# Altium PCB Step Moter Control (1).PcbDoc
Units mil, origin at the board's own origin, x right, y up, seen from the top; angles counter-clockwise.
Board outline 1555.12 x 1653.54 mil, 4 copper layers (Top Layer, Mid-Layer 1, Mid-Layer 2, Bottom Layer), stack 62.296 mil thick; 20 components, 23 nets, 80 pads, 22 vias.
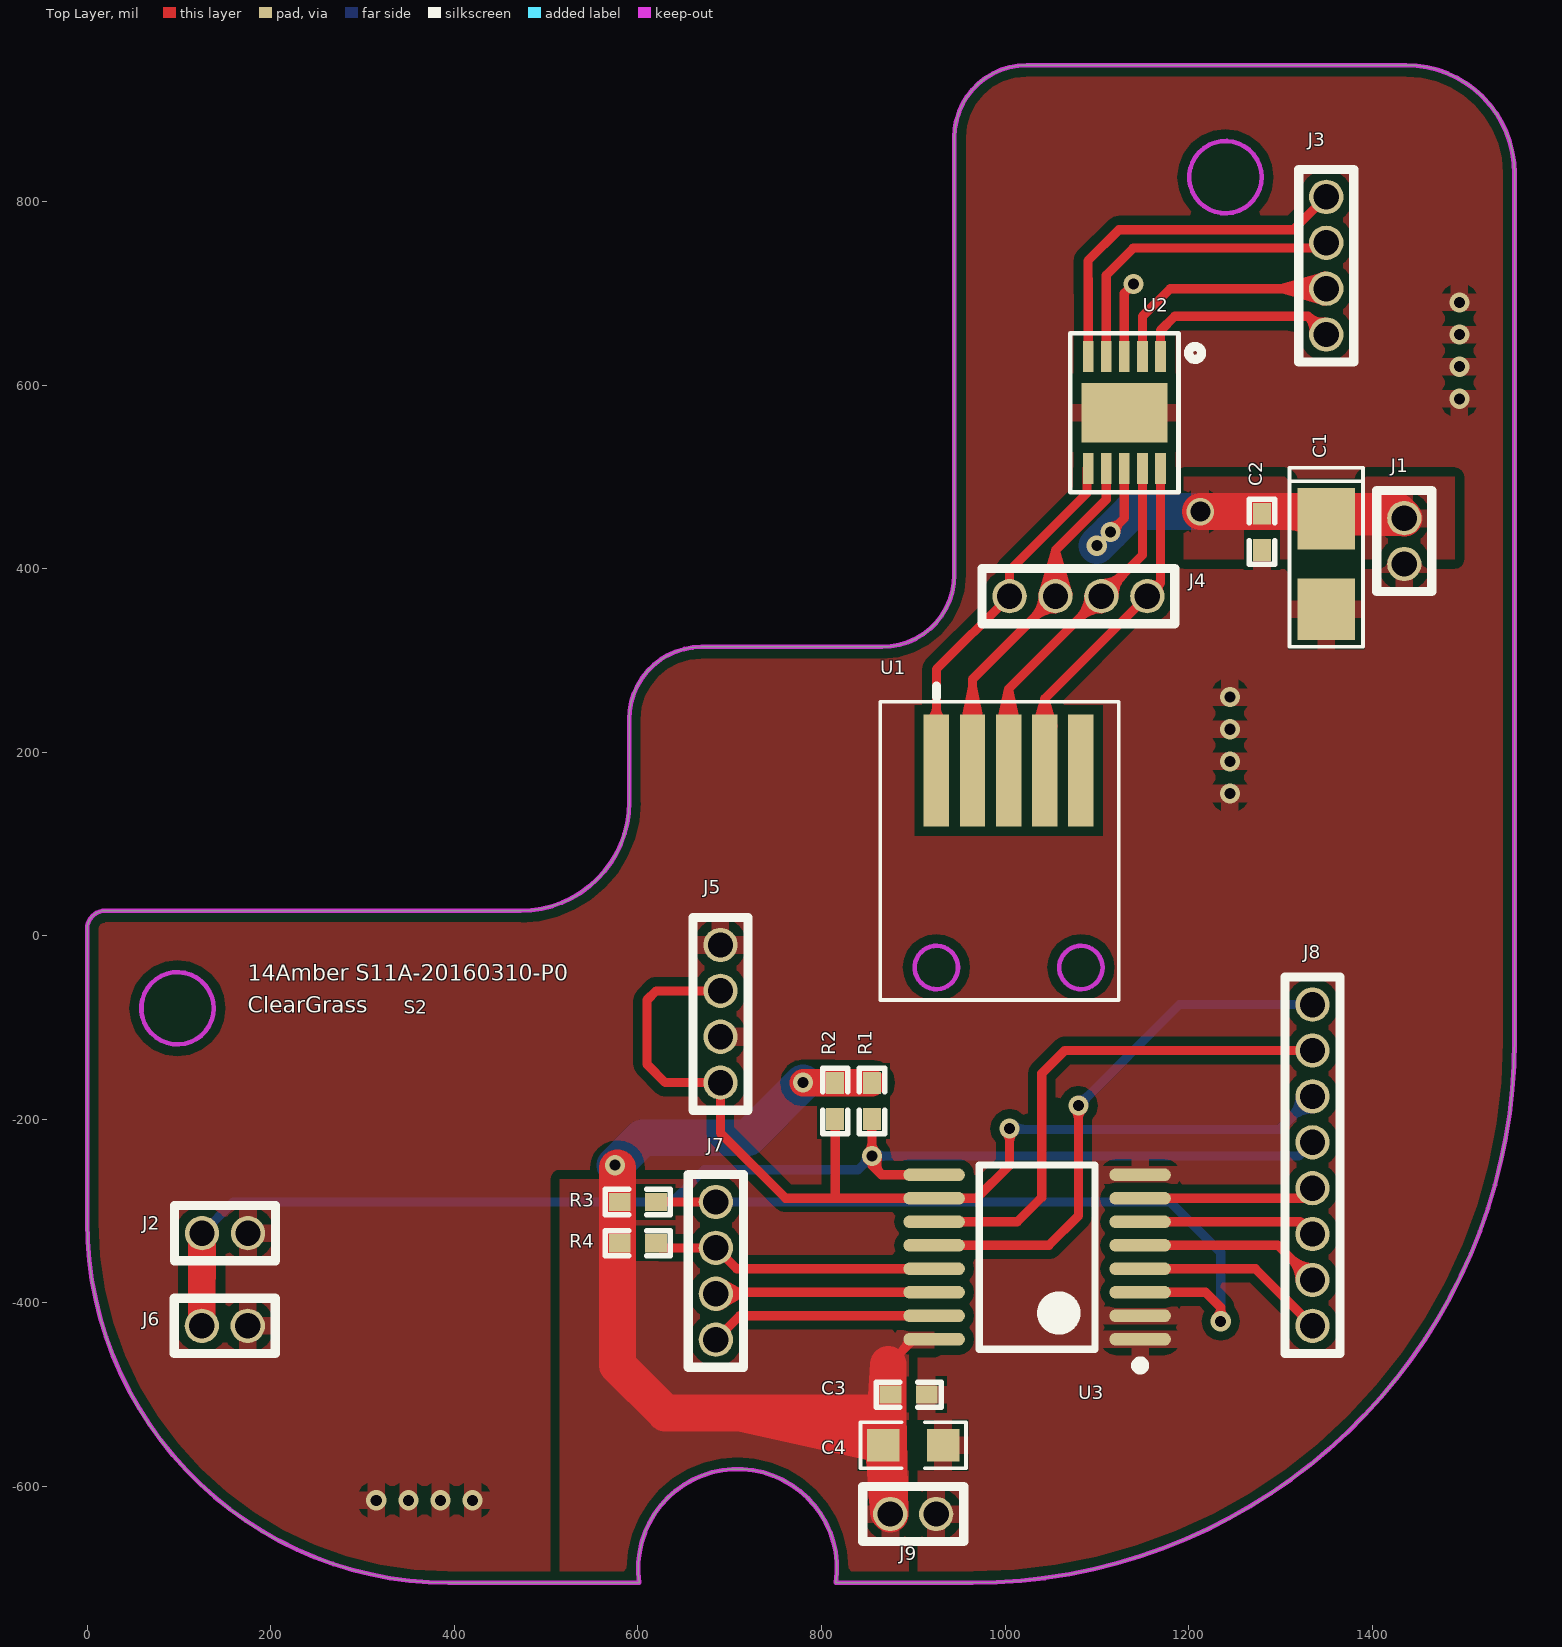
[diagram p0: Top Layer view]
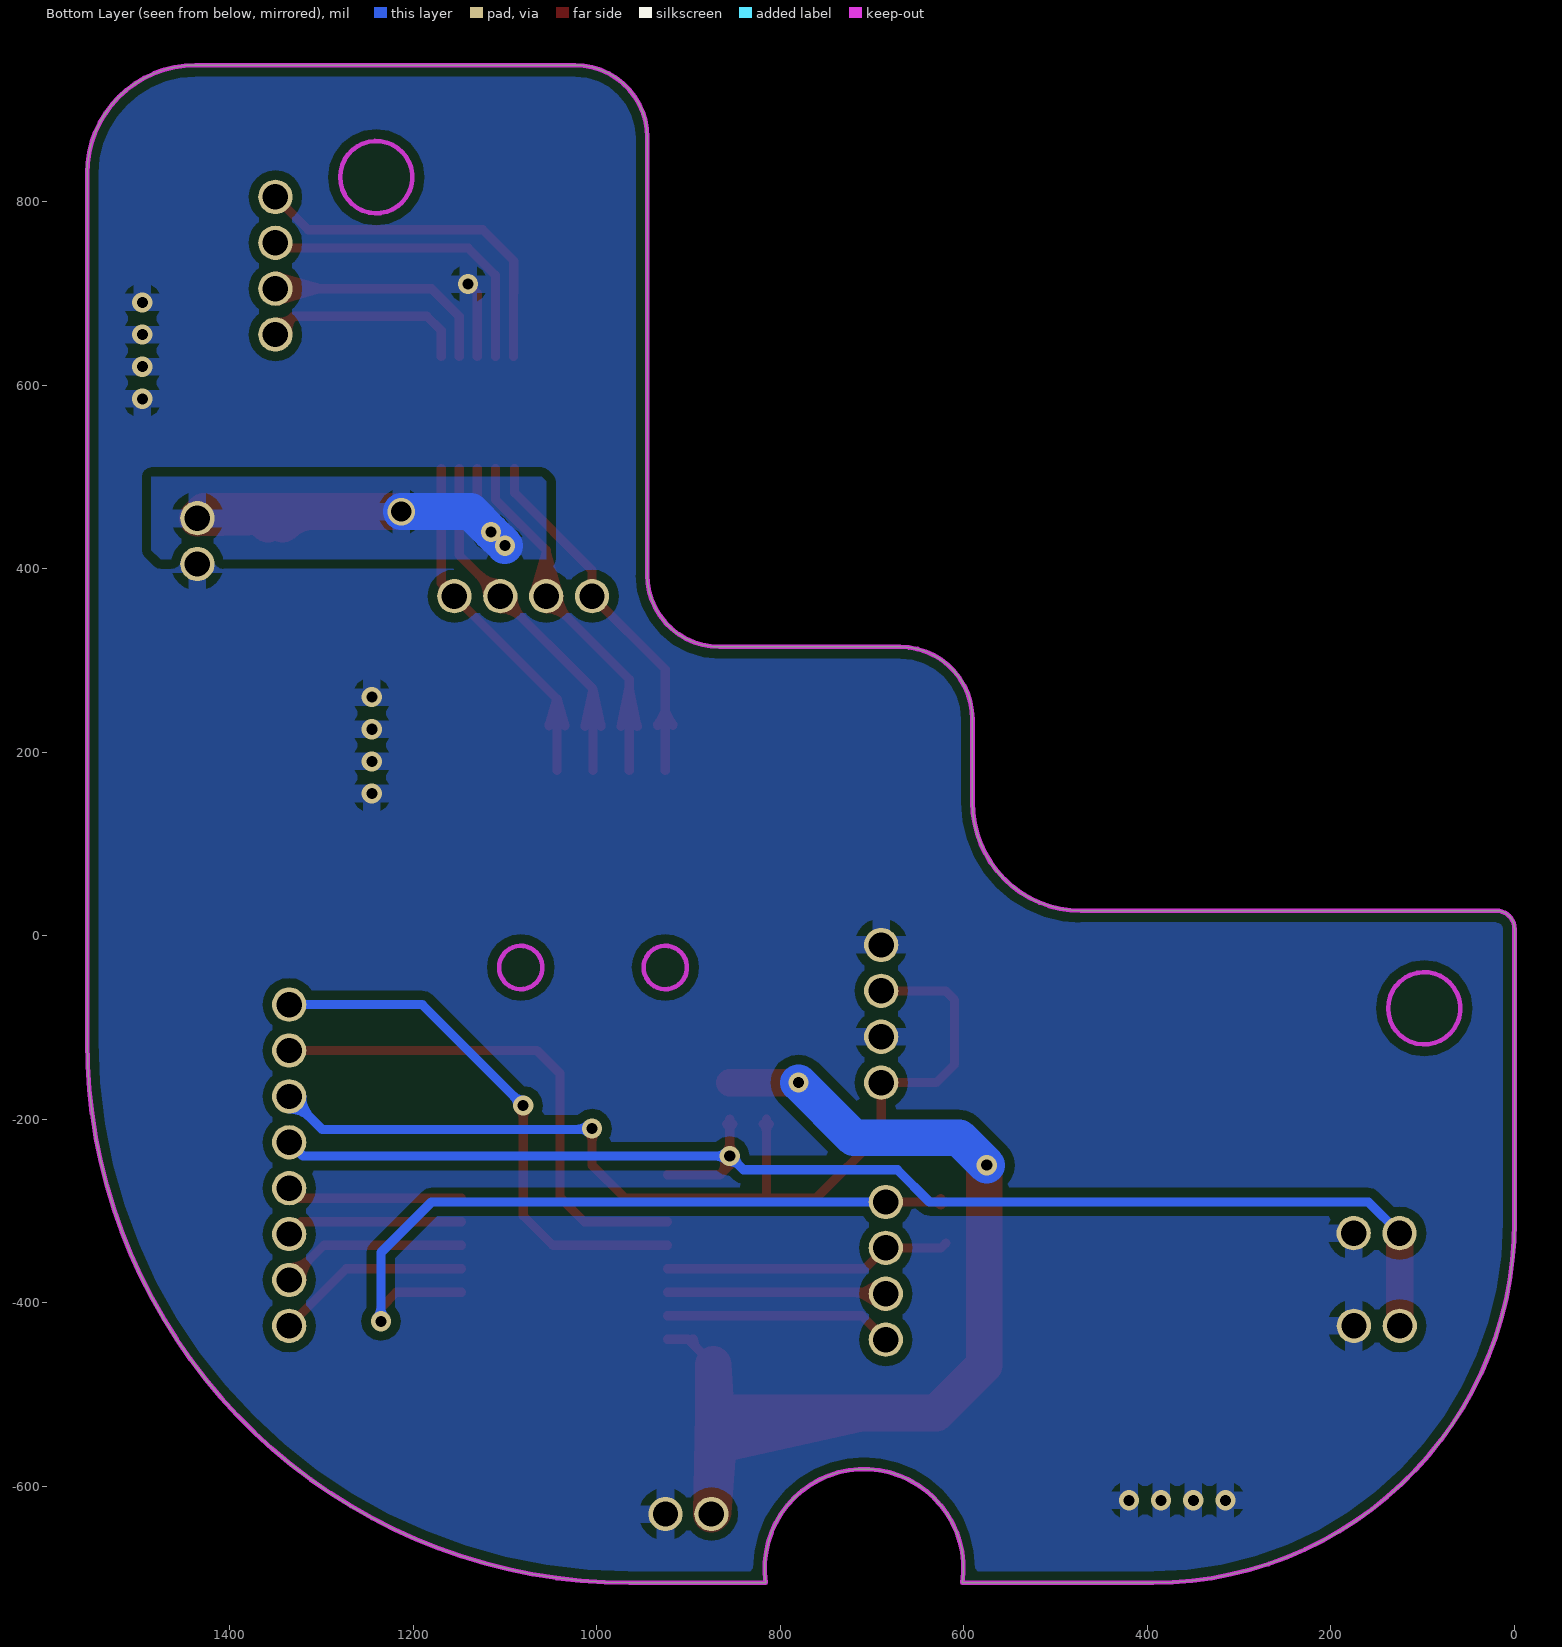
[diagram p1: Bottom Layer view, seen from below]

## Layer stack, top to bottom
Top Layer: signal copper 1.4
Dielectric: core 31.4961, FR-4, Dk 4.8
Mid-Layer 1: signal copper 1.4
Dielectric: prepreg 12.6, FR-4, Dk 4.8
Mid-Layer 2: signal copper 1.4
Dielectric: core 12.6, FR-4, Dk 4.8
Bottom Layer: signal copper 1.4

## Board outline
0,-311.3 ccw(c393.7,-311.3) 393.7,-705 601.55,-705 cw(c708.66,-689.25) 815.78,-705 964.57,-705 ccw(c964.57,-114.45) 1555.12,-114.45 1555.12,830.43 ccw(c1437.01,830.43) 1437.01,948.54 1023.62,948.54 ccw(c1023.62,869.8) 944.88,869.8 944.88,393.43 cw(c866.14,393.43) 866.14,314.69 669.29,314.69 ccw(c669.29,235.95) 590.55,235.95 590.55,145.39 cw(c472.44,145.39) 472.44,27.28 19.68,27.28 ccw(c19.68,7.6) 0,7.6

## Design rules (kind name [scope] priority, off if disabled: settings)
Clearance [All] p1: gap=10
HoleToHoleClearance [All] p1: gap=0 allowstackedmicrovias=TRUE
MinimumSolderMaskSliver [All] p1: minsoldermaskwidth=0
PolygonConnect [All] p1: connectstyle=Relief reliefconductorwidth=19.68 reliefentries=4 polygonreliefangle="90 Angle"
RoutingVias [All] p1: holewidth=28 width=50 viastyle="Through Hole" minholewidth=28 minwidth=50 maxholewidth=28 maxwidth=50
SilkToSilkClearance [All] p1: silktosilkclearance=0
SilkscreenOverComponentPads [All] p1: minsilkscreentomaskgap=0
SolderMaskExpansion [All] p1: expansion=4
Width [All] p1: maxlimit=50 minlimit=8 preferedwidth=10
24 further rules are at their usual default settings.

## Classes and differential pairs
component class "Remote 8-bit I2C": C3 C4 J7 J8 J9 R3 R4 U3
component class "Step Moter Control": C1 C2 J1 J2 J3 J4 J5 J6 R1 R2 U1 U2

## Components (designator, comment, footprint, x,y, rotation, side; value= is the part's Value field where it differs from the comment)
C1 "10uF/6.3V" 3216 1350,405 r270 top
C2 "0.1uF/10V/X7R/10%" 0402C 1280,440 r270 top
C3 "0.1uF/10V/X7R/10%" 0402C 895,-500 r0 top
C4 "10uF/10V/X7R/10%" 0603C 900,-555 r0 top
J1 "JAMP" "Debug- 1.27*2" 1435,430 r270 top
J2 "TEST" "Debug- 1.27*2" 150.24,-323.98 r0 top locked
J3 "JAMP" "Debug- 1.27*4" 1350,730 r90 top
J4 "JAMP" "Debug- 1.27*4" 1080,370 r180 top
J5 "JAMP" "Debug- 1.27*4" 690,-85 r90 top
J6 "JAMP" "Debug- 1.27*2" 150,-425 r0 top
J7 "JAMP" "Debug- 1.27*4" 685,-365 r90 top
J8 "JAMP" "Debug- 1.27*8" 1335,-250 r90 top
J9 "JAMP" "Debug- 1.27*2" 900,-630 r0 top
R1 "4.7K/1%" 0402R 855,-180 r90 top
R2 "4.7K/1%" 0402R 815,-180 r90 top
R3 "10K/1%" 0402R 600,-290 r180 top
R4 "10K/1%" 0402R 600,-335 r180 top
U1 "VSM1069" FPC_CON5-6200 1003.94,180 r90 top
U2 "A3901" DFN10 1130,570 r180 top
U3 "PCA9538" TSSOP-16 1035,-350 r180 top

## Footprints (in the part's own frame and the unit in brackets; to place one, negate y for a bottom-side part, rotate by r counter-clockwise, add the part's x,y. Pads: shape width x height; smd on the part's side, far side on the other; paste and mask are expansions set on the pad)
0402C [mm]
  rect 0.6x0.5 smd: 1(-0.5,0) 2(0.5,0)
  silkscreen extent -0.9,-0.35 0.9,0.35, body extent -0.51,-0.25 0.51,0.25, height 0.5
0402R [mm]
  rect 0.6x0.5 smd: 1(-0.5,0) 2(0.5,0)
  silkscreen extent -0.9,-0.35 0.9,0.35, body extent -0.51,-0.25 0.51,0.25, height 0.5
0603C [mm]
  rect 0.9x0.9 smd: 1(-0.826,0) 2(0.826,0)
  silkscreen extent -1.46,-0.64 1.46,0.64, body extent -1.38,-0.55 1.38,0.55, height 0.9
3216 [mm]
  rect 1.7x1.6 smd: 1(-1.256,0) 2(1.256,0)
  silkscreen extent -2.67,-1.02 2.29,1.02, body extent -1.72,-0.85 1.72,0.85, height 1.8
"Debug- 1.27*2" [mm]
  round 0.95 hole 0.7: 1(-0.635,0) 2(0.635,0)
  silkscreen extent -1.4,-0.76 1.4,0.76, body extent -1.21,-0.58 1.21,0.58
"Debug- 1.27*4" [mm]
  round 0.95 hole 0.7: 1(-1.905,0) 2(-0.635,0) 3(0.635,0) 4(1.905,0)
  silkscreen extent -2.67,-0.76 2.67,0.76
"Debug- 1.27*8" [mm]
  round 0.95 hole 0.7: 1(-4.445,0) 2(-3.175,0) 3(-1.905,0) 4(-0.635,0) 5(0.635,0) 6(1.905,0) 7(3.175,0) 8(4.445,0)
  silkscreen extent -5.21,-0.76 5.21,0.76
DFN10 [mm]
  rect 0.3x0.85 smd: 1(-1,-1.55) 2(-0.5,-1.55) 3(0,-1.55) 4(0.5,-1.55) 5(1,-1.55) 6(1,1.55) 7(0.5,1.55) 8(0,1.55) 9(-0.5,1.55) 10(-1,1.55)
  rect 2.38x1.65 smd: 11(0,0)
  silkscreen extent -2.14,-2.2 1.5,2.2
FPC_CON5-6200 [mm]
  rect 3.1x0.7 smd: 1(0,2) 2(0,1) 3(0,0) 4(0,-1) 5(0,-2)
  Keep-Out Layer circle w0.127: c-5.45,-2 r0.6
  Keep-Out Layer circle w0.127: c-5.45,2 r0.6
  silkscreen extent -6.35,-3.05 2.34,3.55
TSSOP-16 [mm] "TSOP, 16-Leads, Body 5.1x4.5mm (max), Pitch 0"
  oval 1.7x0.35 smd: 1(-2.85,2.275) 2(-2.85,1.625) 3(-2.85,0.975) 4(-2.85,0.325) 5(-2.85,-0.325) 6(-2.85,-0.975) 7(-2.85,-1.625) 8(-2.85,-2.275) 9(2.85,-2.275) 10(2.85,-1.625) 11(2.85,-0.975) 12(2.85,-0.325) 13(2.85,0.325) 14(2.85,0.975) 15(2.85,1.625) 16(2.85,2.275)
  silkscreen extent -2.98,-2.55 1.6,3.12, body extent -2.25,-2.55 2.25,2.55, height 1.2

## Part data
C1: library part Capacitor, "厂家：ROH"
C2 C3: library part CAP, "厂家：Murata，型号：GRM155"
C4: library part CAP, "厂家：Murata，型号：GRM188"
J1 J2 J3 J4 J5 J6 J7 J8 J9: "厂家：Ô"
R1 R2 R3 R4: library part RES1, "厂家：Yageo，型号：RC0"
U1: "厂家：常州唯可泰"
U2: "厂家：Allegro ，型号：A3901 Two phase stepper"
U3: library part P, "厂家：TI，型号：PCA9538 Remote 8-bit I2C with interrupt output"

## Via types
v1: diameter 22, hole 12, Top Layer to Bottom Layer, 21 vias
v2: diameter 30, hole 22, Top Layer to Bottom Layer, 1 vias

## Nets (pads, with @x,y where several pads share a name; then routed paths per layer and width w, separated by ;. In a path a pad name is that pad's centre, name@x,y a point inside that pad or via, vN(x,y) a via of type N, cw(c..) or ccw(c..) an arc to the next point about the centre after c; other vN are vias at no path point)
2.8V: C3.1 C4.1 J9.1 R1.2 R2.2 R3.2 R4.2 U3.16 | length 2085
  Top Layer w10: 872.87,-467.13 900.43,-439.57 U3.16 ; 890.02,-449.98 ccw(c879.6,-439.57) U3.16@894.33,-439.57 ; 892.36,-446.93 U3.16@896.22,-439.57
  Top Layer w30: v1(780,-160) v1@780.31,-160.31 ; v1(780,-160) R2.2 ; v1(780,-160) R2.2 ; v1@780.31,-160.31 R2.2 ; v1@780.31,-160.31 R2.2 ; R2.2 R1.2 R2.2
  Top Layer w40: v1@577.87,-252.87 577.87,-467.87 630,-520 872.87,-520 ; 710.58,-520 C4.1 ; 788.52,-520 cw(c788.52,-633.98) C4.1@869.11,-553.39 ; 818.02,-523.88 C4.1 ; C4.1 872.87,-467.13 872.87,-520 ; C4.1 872.87,-520 ; C4.1 872.87,-520 ; C4.1 J9.1@872.87,-627.87 ; C4.1 872.87,-520 ; C4.1 J9.1 ; J9.1@872.87,-627.87 J9.1 ; J9.1@872.87,-627.87 872.87,-520 ; 872.87,-520 J9.1
  Bottom Layer w40: v1(575,-250) 605,-220 720,-220 ; 720,-220 v1(780,-160) 720,-220
AW_CONTROL: J8.2 U3.5 | length 292.3
  Top Layer w10: U3.5 1297.2,-337.2 J8.2 ; U3.5@1173.78,-337.2 1210.67,-337.2 ; J8.2@1321.3,-375 ccw(c1288.22,-375) 1311.61,-351.61 ccw(c1335,-328.22) J8.2@1335,-361.3
BUZZER_POWER: J8.4 U3.7 | length 229.3
  Top Layer w10: U3.7 1323.98,-286.02 J8.4 ; U3.7@1173.78,-286.02 1210.67,-286.02
DC/DC_CTRL: J8.3 U3.6 | length 245.8
  Top Layer w10: U3.6 1321.61,-311.61 ; U3.6@1173.78,-311.61 1210.67,-311.61 ; J8.3@1322.77,-318.82 ccw(c1317.21,-316.02) 1321.61,-311.61 ; J8.3@1328.82,-312.77 cw(c1326.02,-307.21) 1321.61,-311.61 ; J8.3 1321.61,-311.61
DC/DC_PG: J8.7 U3.11 | length 605.5
  Top Layer w10: U3.11 1013.39,-311.61 1040,-285 1040,-150 1065,-125 J8.7 ; U3.11@949.37,-311.61 986.26,-311.61
EXTEND_I\N\T\: J7.3 R4.1 U3.13 | length 351.5
  Top Layer w10: R4.1 624.68,-340 J7.3 707.8,-362.8 U3.13 ; 859.33,-362.8 U3.13@896.22,-362.8
EXTEND_R\E\S\E\T\: J7.4 R3.1 U3.3 | length 963.4
  Top Layer w10: R3.1 J7.4 ; R3.1@621.65,-290 661.5,-290 ; R3.1@625.08,-293.42 cw(c633.34,-301.69) 633.34,-290 cw(c633.34,-278.31) R3.1@625.08,-286.58 ; U3.3 1218.39,-388.39 1235,-405 v1(1235,-420) ; U3.3@1173.78,-388.39 1210.67,-388.39 ; v1@1230.76,-415.76 ccw(c1220.51,-405.51) 1235,-405.51 ccw(c1249.49,-405.51) v1@1239.24,-415.76
  Bottom Layer w10: J7.4 1180,-290 1235,-345 v1(1235,-420) ; v1@1230.76,-415.76 ccw(c1220.51,-405.51) 1235,-405.51 ccw(c1249.49,-405.51) v1@1239.24,-415.76
GND: C1.2 C2.2 C3.2 C4.2 J1.2 J2.2 J5.2 J5.4 J6.2 J9.2 U2.3 U2.11 U3.1 U3.2 U3.8 | length 83.1
  Top Layer w10: U2.3 1130,700 v1(1140,710)
  other v1: 315,-615 350,-615 385,-615 420,-615 1245,155 1245,190 1245,225 1245,260 1495,585 1495,620 1495,655 1495,690
HALL_OUT: J8.1 U3.4 | length 250.5
  Top Layer w10: U3.4 1272.8,-362.8 J8.1 ; U3.4@1173.78,-362.8 1210.67,-362.8
I2C_A_SCL_T_E: J7.2 U3.14 | length 474.9
  Top Layer w10: J7.2@687.7,-376.57 707.05,-387.45 ; J7.2@688.33,-376.71 711.99,-389.7 ; J7.2@688.62,-403.21 711.99,-389.7 ; J7.2@690.7,-402.46 707.05,-387.45 ; J7.2@694.69,-399.69 cw(c721.97,-426.97) 721.97,-388.39 ; J7.2@694.69,-380.31 ccw(c714.18,-360.82) 714.18,-388.39 ; 859.33,-388.39 U3.14@896.22,-388.39 ; U3.14 686.61,-388.39 J7.2 ; J7.2 711.99,-389.7 ; J7.2 707.05,-387.45
I2C_A_SDA_T_E: J7.1 U3.15 | length 285.5
  Top Layer w10: J7.1 711.02,-413.98 U3.15 ; 859.33,-413.98 U3.15@896.22,-413.98
INIT_TEST: J2.1 J6.1 J8.5 R1.1 U3.9 | length 1790.8
  Top Layer w10: v1@850.34,-243.78 860.43,-251.44 ; v1@850.76,-235.76 ccw(c840.52,-225.51) 855,-225.51 ccw(c869.49,-225.51) v1@859.24,-235.76 ; R1.1@851.58,-205.08 cw(c843.31,-213.34) 855,-213.34 cw(c866.69,-213.34) R1.1@858.42,-205.08 ; v1@855,-241.5 R1.1@855,-201.65 ; v1(855,-240) 860.43,-251.44 ; R1.1 855,-250 865.43,-260.43 ; v1@860.74,-241.74 ccw(c878.7,-247.17) 865.43,-260.43 ; v1@860.88,-238.78 860.43,-251.44 ; U3.9@896.22,-260.43 865.43,-260.43 ; U3.9 865.43,-260.43
  Top Layer w30: J6.1 125,-324.21 J2.1 J6.1
  Bottom Layer w10: J2.1 159.21,-290 637.34,-290 672.34,-255 840,-255 v1(855,-240) 1320,-240 J8.5 ; v1@849,-240 cw(c834.51,-240) 844.76,-250.24 cw(c855,-260.49) v1@855,-246 ; v1@859.24,-244.24 cw(c869.49,-254.49) 869.49,-240 cw(c869.49,-225.51) v1@859.24,-235.76
MOTOR_A: J4.1 U1.4 U2.10 | length 621.5
  Top Layer w10: U1.4@1034.62,228.48 1043.31,258.31 ; U1.4@1034.77,229.3 1042.58,242.95 ; U1.4@1035,230.08 1044.03,242.95 ; U1.4@1037.1,233.45 ccw(c1022.11,248.44) 1043.31,248.44 ccw(c1064.5,248.44) U1.4@1049.52,233.45 ; U1.4 1043.31,258.31 ; U1.4@1051.62,230.08 1042.58,242.95 ; U1.4@1051.84,229.3 1044.03,242.95 ; U1.4@1052,228.48 1043.31,258.31 ; J4.1@1160.35,382.61 ccw(c1163.56,390.18) 1169.37,384.37 ; J4.1@1167.61,375.35 cw(c1175.18,378.56) 1169.37,384.37 ; U2.10 1169.37,384.37 ; 1042.58,242.95 U1.4@1043.31,227.24 ; U1.4@1043.31,227.24 1044.03,242.95 ; U1.4@1043.31,227.24 1043.31,258.31 ; 1043.31,258.31 J4.1 1169.37,384.37
MOTOR_A\: J4.2 U1.3 U2.9 | length 746
  Top Layer w10: U1.3@995.21,228.17 1003.94,268.94 ; U1.3@995.4,229.3 1003.21,242.95 ; U1.3@995.63,230.08 1004.66,242.95 ; U1.3@997.73,233.45 ccw(c982.74,248.44) 1003.94,248.44 ccw(c1025.13,248.44) U1.3@1010.15,233.45 ; U1.3 1003.94,268.94 ; U1.3@1012.25,230.08 1003.21,242.95 ; U1.3@1012.47,229.3 1004.66,242.95 ; U1.3@1012.67,228.17 1003.94,268.94 ; J4.2@1091.3,370 cw(c1058.22,370) 1081.61,346.61 cw(c1105,323.22) J4.2@1105,356.3 ; J4.2@1105,383.7 ccw(c1105,416.78) 1128.39,393.39 ccw(c1151.78,370) J4.2@1118.7,370 ; U2.9 1149.69,414.69 J4.2 1003.94,268.94 ; 1003.21,242.95 U1.3@1003.94,227.24 ; U1.3@1003.94,227.24 1003.94,268.94 ; U1.3@1003.94,227.24 1004.66,242.95
MOTOR_B: J4.3 U1.2 U2.7 | length 996.9
  Top Layer w10: U1.2@955.83,228.12 964.57,271.02 ; U1.2@956.03,229.3 963.84,242.95 ; U1.2@956.26,230.08 965.29,242.95 ; U1.2@958.36,233.45 ccw(c943.37,248.44) 964.57,248.44 ccw(c985.76,248.44) U1.2@970.77,233.45 ; U1.2 964.57,279.57 J4.3 ; U1.2@972.88,230.08 963.84,242.95 ; U1.2@973.1,229.3 965.29,242.95 ; U1.2@973.3,228.12 964.57,271.02 ; J4.3@1041.3,370 cw(c1008.22,370) 1031.61,346.61 cw(c1055,323.22) J4.3@1055,356.3 ; J4.3@1041.44,371.93 1055,418.7 J4.3@1068.56,371.93 ; J4.3@1041.68,373.22 1053.87,394.52 ; J4.3@1042.03,374.42 1056.13,394.52 ; J4.3@1045.31,379.69 ccw(c1021.92,403.08) 1055,403.08 ccw(c1088.08,403.08) J4.3@1064.69,379.69 ; J4.3@1067.97,374.42 1053.87,394.52 ; J4.3@1068.32,373.22 1056.13,394.52 ; U2.7 1110.32,475.32 1055,420 J4.3 ; 963.84,242.95 U1.2@964.57,227.24 ; U1.2@964.57,227.24 965.29,242.95 ; U1.2@964.57,227.24 964.57,271.02 ; 1053.87,394.52 J4.3 ; J4.3 1056.13,394.52
MOTOR_B\: J4.4 U1.1 U2.6 | length 524.6
  Top Layer w10: U1.1@916.66,229.3 924.47,242.95 ; U1.1@916.89,230.08 925.92,242.95 ; U1.1@918.99,233.45 ccw(c904,248.44) 925.2,248.44 ccw(c946.39,248.44) U1.1@931.4,233.45 ; U1.1 925.2,290.2 J4.4 1005,398.28 1089.41,482.69 U2.6@1089.41,508.98 ; U1.1@933.51,230.08 924.47,242.95 ; U1.1@933.73,229.3 925.92,242.95 ; 924.47,242.95 925.2,227.24 925.92,242.95
P7: J8.8 U3.12 | length 673.5
  Top Layer w10: U3.12 1047.8,-337.2 1080,-305 v1(1080,-185) ; U3.12@949.37,-337.2 986.26,-337.2 ; v1@1075.76,-189.24 cw(c1065.51,-199.49) 1080,-199.49 cw(c1094.49,-199.49) v1@1084.24,-189.24
  Bottom Layer w10: v1(1080,-185) 1190,-75 J8.8 ; v1@1080,-179 ccw(c1080,-164.51) 1090.24,-174.76 ccw(c1100.49,-185) v1@1086,-185
PLUS_IN1_A: J3.1 U2.1 | length 264
  Top Layer w10: U2.1 1169.37,659.37 1185,675 1330,675 ; J3.1@1336.39,656.6 ccw(c1314.2,659.2) 1330,675 ; J3.1@1348.4,668.61 cw(c1345.8,690.8) 1330,675 ; J3.1 1330,675
PLUS_IN2_A\: J3.2 U2.2 | length 601.8
  Top Layer w10: U2.2 1149.69,674.69 1180,705 J3.2 ; J3.2@1340.31,695.31 ccw(c1316.92,671.92) 1316.92,705 ccw(c1316.92,738.08) J3.2@1340.31,714.69 ; J3.2@1345.58,692.03 1325.48,706.13 ; J3.2@1345.58,717.97 1325.48,703.87 ; J3.2@1346.78,691.68 1325.48,703.87 ; J3.2@1346.78,718.32 1325.48,706.13 ; J3.2@1348.07,691.44 1301.3,705 ; J3.2@1348.07,718.56 1301.3,705 ; 1301.3,705 J3.2 ; 1325.48,703.87 J3.2 ; 1325.48,706.13 J3.2
PLUS_IN3_B: J3.3 U2.4 | length 343
  Top Layer w10: U2.4 1110.32,719.69 1139.77,749.14 1344.14,749.14 J3.3
PLUS_IN4_B\: J3.4 U2.5 | length 408.5
  Top Layer w10: 1090.32,700 1090.32,735.32 1124.14,769.14 1314.14,769.14 J3.4 ; U2.5 1090.63,715.63
SW_TEST: J5.1 J5.3 J8.6 R2.1 U3.10 | length 1345.6
  Top Layer w10: J5.3 620,-60 610,-70 610,-140 630,-160 J5.1 690,-215 761.02,-286.02 815,-286.02 ; R2.1@811.58,-205.08 cw(c803.31,-213.34) 815,-213.34 cw(c826.69,-213.34) R2.1@818.42,-205.08 ; 815,-241.5 R2.1@815,-201.65 ; R2.1 815,-286.02 ; 859.33,-286.02 U3.10@896.22,-286.02 ; U3.10@949.37,-286.02 968.98,-286.02 ; v1@1000.76,-214.24 cw(c990.51,-224.49) 1005,-224.49 cw(c1019.49,-224.49) v1@1009.24,-214.24 ; v1(1005,-210) 1005,-250 968.98,-286.02 ; 815,-286.02 U3.10 968.98,-286.02
  Bottom Layer w10: v1@1000,-210 1001,-211 1299,-211 J8.6 ; v1@1009.24,-214.24 cw(c1017.07,-222.07) 1017.07,-211 ; v1@1009.24,-205.76 ccw(c1021.9,-193.1) 1021.9,-211 ; J8.6@1321.3,-175 cw(c1288.22,-175) 1311.61,-198.39 cw(c1335,-221.78) J8.6@1335,-188.7
VBAT: C1.1 C2.1 J1.1 U2.8 | length 870.8
  Top Layer w10: v1(1115,440) 1130,455 U2.8 ; v1@1115,446 ccw(c1115,460.49) 1125.24,450.24 ccw(c1135.49,440) v1@1121,440
  Top Layer w40: v2(1212.87,462.13) C1.1@1350,462.13 ; 1308.46,462.13 cw(c1308.46,414.88) C1.1@1341.87,448.29 ; C1.1@1358.13,448.29 cw(c1391.54,414.88) 1391.54,462.13 ; C1.1@1350,462.13 J1.1@1427.87,462.13 ; C1.1@1350,462.13 J1.1 ; J1.1@1427.87,462.13 J1.1 ; J1.1@1427.87,462.13 1350,456.42 J1.1
  Bottom Layer w40: v1(1115,440) v1(1100,425) v1(1115,440) ; v1(1115,440) 1137.13,462.13 ; 1137.13,462.13 v2(1212.87,462.13) 1137.13,462.13
pads on no net: U1.5

## Polygon pours and split planes (outlines as drawn)
VBAT on Bottom Layer "Bottom Layer-No Net" (solid, pour order 4): 1055,495 1060,500 1485,500 1485,420 1475,410 1055,410
GND on Bottom Layer "Bottom Layer-No Net" (solid, remove dead copper, pour order 19): -165,965 -120,1010 1765,1010 1765,-705 1710,-760 1705,-755 -200,-755
VBAT on Top Layer "Bottom Layer-No Net" (solid, pour order 6): 1195,500 1490,500 1490,410 1195,410
2.8V on Top Layer "Bottom Layer-No Net" (solid, remove dead copper, pour order 10): 515,-265 895.43,-265 900,-260.43 895,-265.43 895,-720 525,-720 515,-730
GND on Top Layer "Bottom Layer-No Net" (solid, remove dead copper, pour order 16): -135,1035 1720,1035 1745,1060 1680,995 1680,-730 -130,-730 -220,-820

## Keep-outs
Keep-Out Layer:
  circle w5: c98.43,-79.02 r39.37
  circle w5: c1240.16,826.5 r39.37
  lines w5: 0,-311.3 ccw(c393.7,-311.3) 393.7,-705 601.55,-705 cw(c708.66,-689.25) 815.78,-705 964.57,-705 ccw(c964.57,-114.45) 1555.12,-114.45 1555.12,830.43 ccw(c1437.01,830.43) 1437.01,948.54 1023.62,948.54 ccw(c1023.62,869.8) 944.88,869.8 944.88,393.43 cw(c866.14,393.43) 866.14,314.69 669.29,314.69 ccw(c669.29,235.95) 590.55,235.95 590.55,145.39 cw(c472.44,145.39) 472.44,27.28 19.68,27.28 ccw(c19.68,7.6) 0,7.6 0,-311.3

## Silkscreen, mask and mechanical layers (free items; w line width, h text height)
Top Overlay:
  text "14Amber S11A-20160310-P0" at 175,-55 h30
  text "ClearGrass" at 175,-90 h30
  text "S2" at 345,-90 h25